# Altium PCB source.PcbDoc
Units mm, origin at the board's own origin, x right, y up, seen from the top; angles counter-clockwise.
Board outline 48.89 x 37.97 mm, 4 copper layers (Top Layer, Layer 1, Layer 2, Bottom Layer), stack 0.603 mm thick; 55 components, 44 nets, 142 pads, 12 vias.
Unrouted connection lines stored in the file: 27.
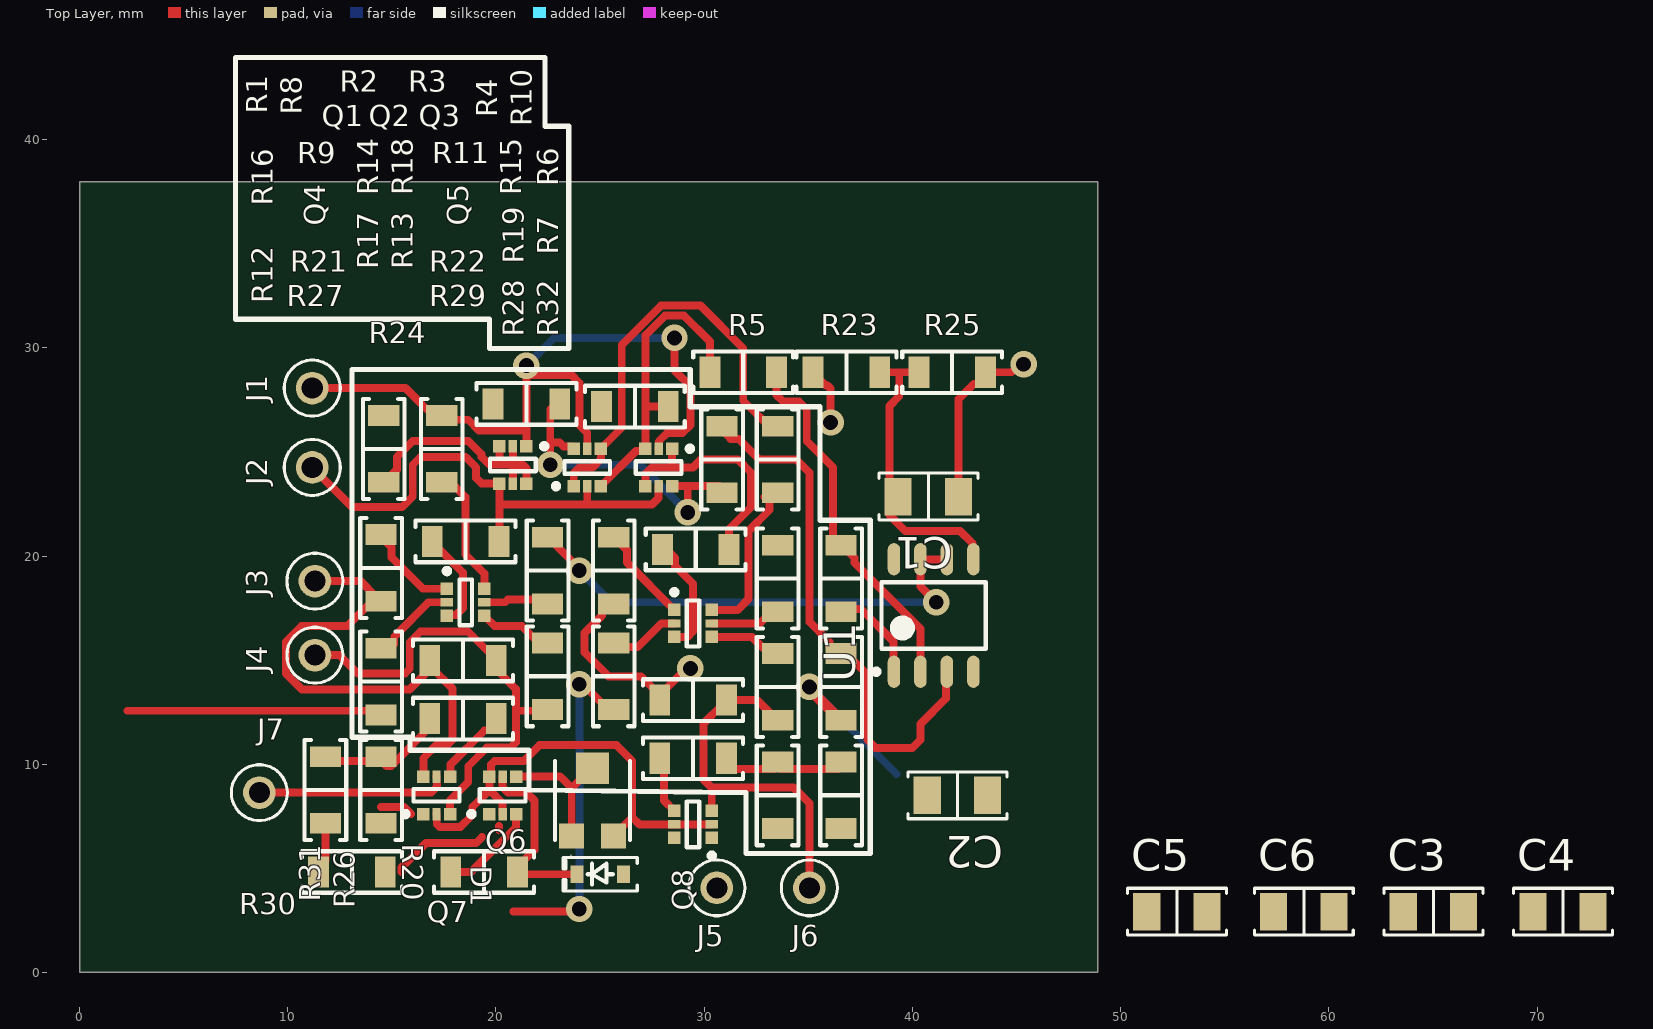
[diagram p0: Top Layer view]
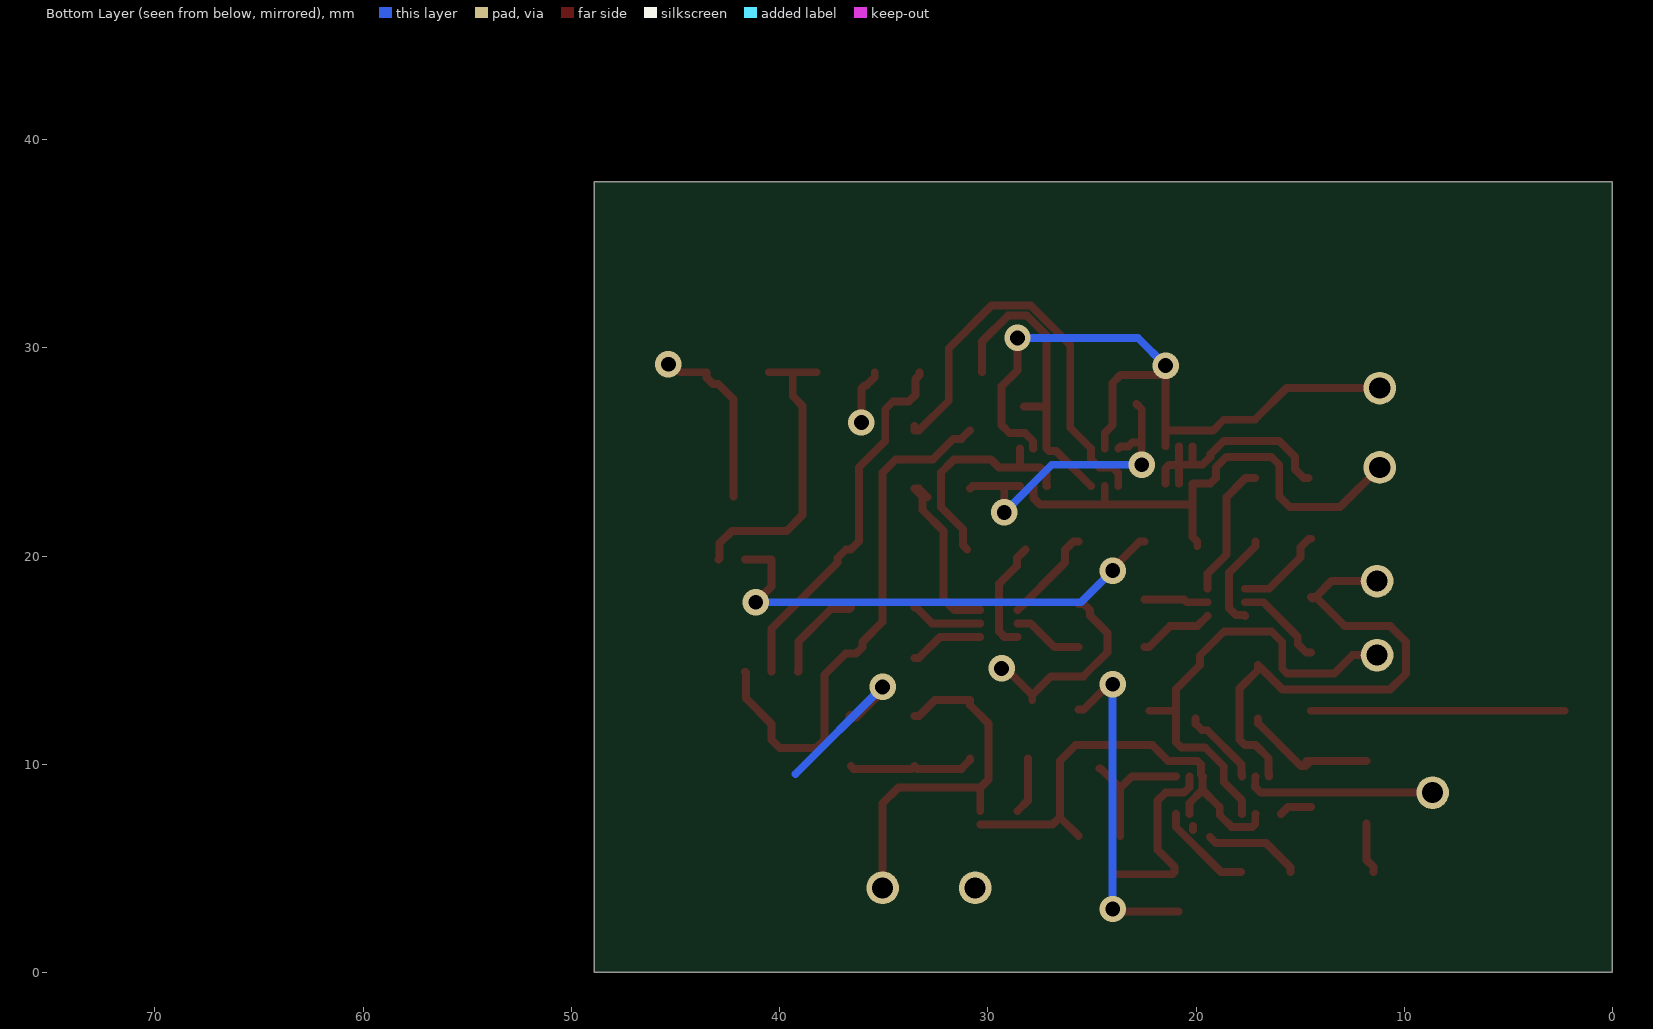
[diagram p1: Bottom Layer view, seen from below]
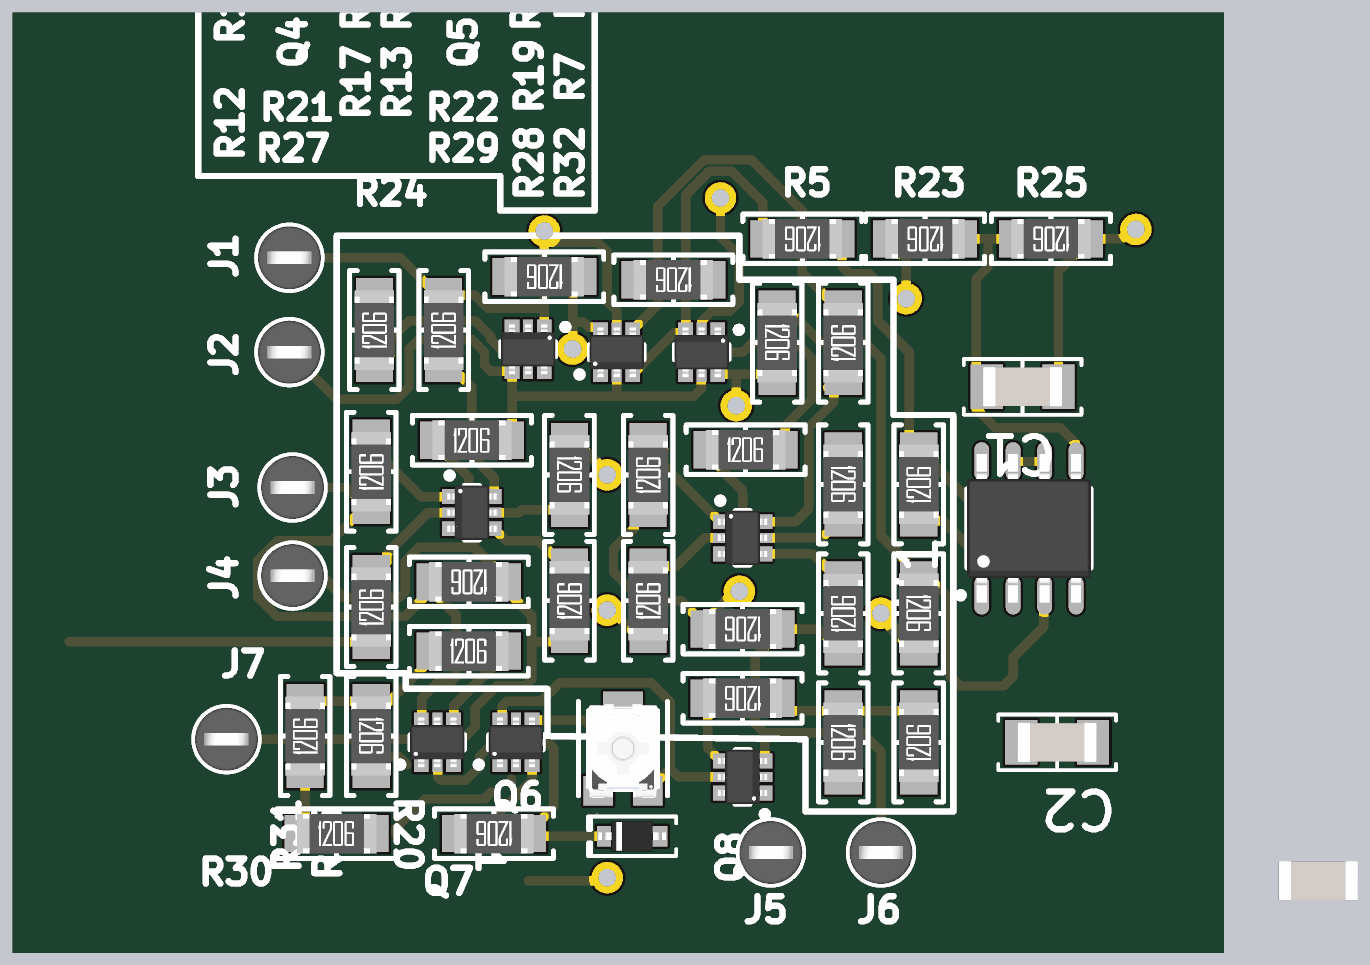
[diagram p2: 3D render of the assembled board from above, using the file's embedded part models]

## Layer stack, top to bottom
Top Solder: solder mask 0.0102, Solder Resist, Dk 3.5
Top Layer: signal copper 0.0356
Dielectric 2: prepreg 0.0711, PP-006, Dk 4.1
Layer 1: signal copper 0.035
Dielectric 1: dielectric 0.32, FR-4, Dk 4.8
Layer 2: signal copper 0.035
Dielectric 3: prepreg 0.0711, PP-006, Dk 4.1
Bottom Layer: signal copper 0.0356
Bottom Solder: solder mask 0.0102, Solder Resist, Dk 3.5

## Board outline
0,0 0,37.973 48.895,37.973 48.895,0

## Design rules (kind name [scope] priority, off if disabled: settings)
BoardOutlineClearance [All] p1: gap=0.3 ignorepadtopadclearanceinfootprint=FALSE except(0.4: Arc-SplitBarrior Arc-SplitContinuation Track-SplitBarrior Track-SplitContinuation SMDPad-SplitBarrior SMDPad-SplitContinuation THPad-SplitBarrior THPad-SplitContinuation Via-SplitBarrior Via-SplitContinuation Fill-SplitBarrior Fill-SplitContinuation Poly-SplitBarrior Poly-SplitContinuation Region-SplitBarrior Region-SplitContinuation Text-SplitBarrior Text-SplitContinuation)
Clearance "Clearance Different Nets" [All] p1: gap=0.2 ignorepadtopadclearanceinfootprint=FALSE except(0.089: Arc-Arc Arc-Track Arc-SMDPad Track-Track Track-SMDPad; 0.127: SMDPad-SMDPad SMDPad-Via THPad-Via Via-Via; 0.254: Arc-Via Arc-Text Track-Via Track-Text SMDPad-Text THPad-Text Via-Text Fill-Text Poly-Text Region-Text Text-Text; 0.5: THPad-THPad Via-Hole)
Clearance "Clearance Same Nets" [All] p2: gap=0.2 ignorepadtopadclearanceinfootprint=FALSE except(0.089: Arc-Arc Arc-Track Arc-SMDPad Track-Track Track-SMDPad SMDPad-SMDPad; 0.127: SMDPad-Via THPad-Via; 0.254: Arc-Via Arc-Text Track-Via Track-Text SMDPad-Text THPad-Text Via-Via Via-Text Fill-Text Poly-Text Region-Text Text-Text)
Clearance "Clearance Bottom Layer" [OnLayer('Bottom Layer')] p3: gap=0.203 ignorepadtopadclearanceinfootprint=TRUE except(0.254: Arc-Text Track-Text SMDPad-Text THPad-Text Via-Text Fill-Text Poly-Text Region-Text Text-Text)
Clearance "Clearance Top Layer" [OnLayer('Top Layer')] p4: gap=0.203 ignorepadtopadclearanceinfootprint=TRUE except(0.254: Arc-Text Track-Text SMDPad-Text THPad-Text Via-Text Fill-Text Poly-Text Region-Text Text-Text)
Clearance [All] p5: gap=0.254 ignorepadtopadclearanceinfootprint=FALSE except(0: Arc-Hole Track-Hole SMDPad-Hole THPad-Hole Via-Hole Fill-Hole Poly-Hole Region-Hole Text-Hole)
HoleSize [All] p1: absolutevalues=TRUE maxlimit=6.3 minlimit=0.2 maxpercent=80.000 minpercent=20.000
MinimumAnnularRing [All] p1: minimumring=0.13
MinimumSolderMaskSliver [All] p1: minsoldermaskwidth=0.1
ParallelSegment [All] p1: limit=254 gap=0.254
PolygonConnect PolygonConnect_1 [All] p1: thpad.connectstyle=Relief thpad.reliefconductorwidth=0.508 thpad.reliefentries=4 thpad.polygonreliefangle="90 Angle" thpad.airgapwidth=0.254 smdpad.connectstyle=Relief smdpad.reliefconductorwidth=0.508 smdpad.reliefentries=4 smdpad.polygonreliefangle="90 Angle" smdpad.airgapwidth=0.254 via.connectstyle=Direct via.reliefconductorwidth=0.508 via.reliefentries=4 via.polygonreliefangle="90 Angle" via.airgapwidth=0.254
PolygonConnect [All] p2: connectstyle=Relief reliefconductorwidth=0.254 reliefentries=4 polygonreliefangle="90 Angle" airgapwidth=0.254
RoutingCorners [All] p1: cornerstyle=Round minsetback=2.54 maxsetback=2.54
RoutingVias [All] p1: holewidth=0.5 width=1 viastyle="Through Hole" minholewidth=0.2 minwidth=0.35 maxholewidth=1 maxwidth=2
SilkToSilkClearance [All] p1: silktosilkclearance=0.1
SilkToSolderMaskClearance [IsPad] p1: minsilkscreentomaskgap=0.1 clearancetoexposedcopper=TRUE
SolderMaskExpansion [All] p1: expansion=0.102 istentingtop=FALSE
Width [All] p1: maxlimit=2.54 minlimit=0.089 preferedwidth=0.381
25 further rules are at their usual default settings.

## Classes and differential pairs
component class misc: C3 C4 C5 C6 C?
component class vca_A: C1 C2 D1 J1 J2 J3 J4 J5 J6 J7 Q1 Q2 Q3 Q4 Q5 Q6 Q7 Q8 R1 R2 R3 R4 R5 R6 R7 R8 R9 R10 R11 R12 R13 R14 R15 R16 R17 R18 R19 R20 R21 R22 R23 R24 R25 R26 R27 R28 R29 R30 R31 R32 U1

## Components (designator, comment, footprint, x,y, rotation, side; value= is the part's Value field where it differs from the comment)
C1 "0.1 µF" "CAP 1206_3216 - 0.8MM" 40.767,22.86 r180 top
C2 "1 µF" "CAP 1206_3216 - 0.8MM" 42.164,8.509 r180 top
C3 "0.1 µF" "CAP 1206_3216 - 0.8MM" 65.024,2.921 r0 top
C4 "1 µF" "CAP 1206_3216 - 0.8MM" 71.247,2.921 r0 top
C5 "0.1 µF" "CAP 1206_3216 - 0.8MM" 52.705,2.921 r0 top
C6 "1 µF" "CAP 1206_3216 - 0.8MM" 58.801,2.921 r0 top
D1 "4V7" SOD323 25.019,4.699 r180 top
J1 "5001" FP-5001-MFG 11.176,28.067 r0 top
J2 "5001" FP-5001-MFG 11.176,24.257 r0 top
J3 "5001" FP-5001-MFG 11.303,18.796 r0 top
J4 "5001" FP-5001-MFG 11.303,15.24 r0 top
J5 "5001" FP-5001-MFG 30.607,4.064 r0 top
J6 "5001" FP-5001-MFG 35.052,4.064 r0 top
J7 "5001" FP-5001-MFG 8.636,8.636 r0 top
Q1 "BC846BS" TSOP65P210X110-6N 20.813,24.373 r270 top
Q2 "BC846BS" TSOP65P210X110-6N 24.384,24.257 r90 top
Q3 "BC846BS" TSOP65P210X110-6N 27.813,24.257 r270 top
Q4 "BC846BS" TSOP65P210X110-6N 18.542,17.78 r0 top
Q5 "BC846BS" TSOP65P210X110-6N 29.464,16.764 r0 top
Q6 "BC846BS" TSOP65P210X110-6N 20.32,8.509 r90 top
Q7 "BC846BS" TSOP65P210X110-6N 17.145,8.509 r90 top
Q8 "BC846BS" TSOP65P210X110-6N 29.464,7.112 r180 top
R1 "330 Ohms" "YAGEO RES 1206_3216" 14.605,25.146 r90 top
R2 "330 Ohms" "YAGEO RES 1206_3216" 21.463,27.305 r180 top
R3 "330 Ohms" "YAGEO RES 1206_3216" 26.67,27.178 r180 top
R4 "5 kOhms" "YAGEO RES 1206_3216" 30.861,24.638 r270 top
R5 "5 kOhms" "YAGEO RES 1206_3216" 31.877,28.829 r180 top
R6 "68 kOhms" "YAGEO RES 1206_3216" 36.576,18.923 r90 top
R7 "68 kOhms" "YAGEO RES 1206_3216" 36.576,13.716 r270 top
R8 "100 Ohms" "YAGEO RES 1206_3216" 17.399,25.146 r90 top
R9 "100 Ohms" "YAGEO RES 1206_3216" 18.542,20.701 r0 top
R10 "100 Ohms" "YAGEO RES 1206_3216" 33.528,24.638 r90 top
R11 "100 Ohms" "YAGEO RES 1206_3216" 29.591,20.32 r0 top
R12 "10 kOhms" "YAGEO RES 1206_3216" 14.478,13.97 r90 top
R13 "10 kOhms" "YAGEO RES 1206_3216" 25.654,14.224 r90 top
R14 "10 kOhms" "YAGEO RES 1206_3216" 22.479,19.304 r270 top
R15 "10 kOhms" "YAGEO RES 1206_3216" 33.528,18.923 r270 top
R16 "100 Ohms" "YAGEO RES 1206_3216" 14.478,19.431 r90 top
R17 "100 Ohms" "YAGEO RES 1206_3216" 22.479,14.224 r90 top
R18 "100 Ohms" "YAGEO RES 1206_3216" 25.654,19.304 r90 top
R19 "100 Ohms" "YAGEO RES 1206_3216" 33.528,13.713 r90 top
R20 "1 kOhms" "YAGEO RES 1206_3216" 19.431,4.826 r180 top
R21 "3.3 kOhms" "YAGEO RES 1206_3216" 18.415,14.986 r180 top
R22 "3.3 kOhms" "YAGEO RES 1206_3216" 29.464,13.081 r180 top
R23 "68 kOhms" "YAGEO RES 1206_3216" 36.83,28.829 r180 top
R24 "TC33X-2-502G" TC33X2503E 24.638,8.255 r0 top
R25 "68 kOhms" "YAGEO RES 1206_3216" 41.91,28.829 r180 top
R26 "1 Ohms" "YAGEO RES 1206_3216" 14.478,8.763 r270 top
R27 "1 Ohms" "YAGEO RES 1206_3216" 18.415,12.192 r0 top
R28 "1 Ohms" "YAGEO RES 1206_3216" 33.528,8.509 r270 top
R29 "1 Ohms" "YAGEO RES 1206_3216" 29.464,10.287 r180 top
R30 "330 Ohms" "YAGEO RES 1206_3216" 13.081,4.826 r0 top
R31 "330 Ohms" "YAGEO RES 1206_3216" 11.811,8.763 r90 top
R32 "330 Ohms" "YAGEO RES 1206_3216" 36.576,8.509 r90 top
U1 "TLV9362" SOIC8-127P600X175-8N 41.021,17.145 r90 top

## Footprints (in the part's own frame and the unit in brackets; to place one, negate y for a bottom-side part, rotate by r counter-clockwise, add the part's x,y. Pads: shape width x height; smd on the part's side, far side on the other; paste and mask are expansions set on the pad)
"CAP 1206_3216 - 0.8MM" [mm] "Chip Capacitor, 2-Leads, Body 3.25x1.60mm, IPC Medium Density"
  rect 1.3x1.8 smd: 1(-1.45,0) 2(1.45,0)
  silkscreen extent -2.37,-1.12 2.37,1.12, body extent -1.6,-0.8 1.6,0.8, height 0.8
FP-5001-MFG [mm]
  round 1.57 hole 1.016 paste-2539.97 mask+0: 1(0,0)
  silkscreen extent -1.35,-1.34 1.35,1.34, body extent -1.45,-1.45 1.45,1.45, height 0.25
SOD323 [mm]
  rect 0.625x0.83 smd: 1(-1.101,-0.02) 2(1.124,-0.02)
  silkscreen extent -1.77,-0.82 1.79,0.78, body extent -1.35,-0.64 1.37,0.6, height 1.05
SOIC8-127P600X175-8N [mm] "SOIC, 8-Leads, Body 4.91x3.90mm, Pitch 1.27mm, IPC Medium Density"
  oval 1.55x0.6 smd: 1(-2.7,1.905) 2(-2.7,0.635) 3(-2.7,-0.635) 4(-2.7,-1.905) 5(2.7,-1.905) 6(2.7,-0.635) 7(2.7,0.635) 8(2.7,1.905)
  silkscreen extent -2.82,-2.5 1.6,2.88, body extent -3,-2.5 3,2.5, height 1.75
TC33X2503E [mm]
  rect 1.2x1.2 smd: 1(-1,-1.7) 3(1,-1.7)
  rect 1.6x1.5 smd: 2(0,1.55)
  silkscreen extent -1.8,-2.64 1.8,1.9, body extent -1.5,-2 1.5,1.8, height 1.22
TSOP65P210X110-6N [mm] "TSOP, 6-Leads, Body 2.00x1.25mm, Pitch 0.65mm, IPC Medium Density"
  rect 0.6x0.6 smd: 1(-0.9,0.65) 3(-0.9,-0.65) 4(0.9,-0.65) 6(0.9,0.65)
  rect 0.6x0.4 smd: 2(-0.9,0) 5(0.9,0)
  silkscreen extent -1.02,-1.1 0.3,1.63, body extent -1.04,-1.1 1.04,1.1, height 1.1
"YAGEO RES 1206_3216" [mm] "Chip Resistor, 2-Leads, Body 3.13x1.55mm"
  rect 1x1.5 smd: 1(-1.6,0) 2(1.6,0)
  silkscreen extent -2.4,-1 2.4,1, body extent -1.6,-0.8 1.6,0.8, height 0.6

## Part data
C1 C3 C5: library part 885012208087, "CAP CER 0.1UF 50V X7R 1206", Device Package="1206 (3216 Metric)", manufacturer="Würth Elektronik", Operating Temperature="-55°C ~ 125°C", Supplier Part Number 1=732-8127-1-ND, Temperature Coefficient=X7R, Tolerance=±10%, Voltage - Rated=50V, Applications="General Purpose", Capacitance="0.1 µF", componentlink1description=Datasheet, componentlink1url=https://katalog.we-online.de/pbs/datasheet/885012208087.pdf, componentlink2description="DigiKey Link", componentlink2url=https://www.digikey.com/en/products/detail/würth-elektronik/885012208087/5453982, lastupdated="6/4/2024 19:10:27", Lifecycle Status=Active, Minimum Order=1, Mounting Type="Surface Mount, MLCC", Package / Case="1206 (3216 Metric)", Packaging=TapeAndReel, Part Number=885012208087, Part Status=Active, partid=20879, price=0.06, Series=WCAP-CSGP, Size / Dimension="0.126\" L x 0.063\" W (3.20mm x 1.60mm)", Supplier 1=DigiKey, Thickness (Max)="0.035\" (0.90mm)"
C2 C4 C6: library part 885012208093, "CAP CER 1UF 50V X7R 1206", Device Package="1206 (3216 Metric)", manufacturer="Würth Elektronik", Operating Temperature="-55°C ~ 125°C", Supplier Part Number 1=732-7577-1-ND, Temperature Coefficient=X7R, Tolerance=±10%, Voltage - Rated=50V, Applications="General Purpose", Capacitance="1 µF", componentlink1description=Datasheet, componentlink1url=https://katalog.we-online.de/pbs/datasheet/885012208093.pdf, componentlink2description="DigiKey Link", componentlink2url=https://www.digikey.com/en/products/detail/würth-elektronik/885012208093/5453432, lastupdated="6/4/2024 19:10:33", Lifecycle Status=Active, Minimum Order=1, Mounting Type="Surface Mount, MLCC", Package / Case="1206 (3216 Metric)", Packaging=TapeAndReel, Part Number=885012208093, Part Status=Active, partid=39665, price=0.10, Series=WCAP-CSGP, Size / Dimension="0.126\" L x 0.063\" W (3.20mm x 1.60mm)", Supplier 1=DigiKey, Thickness (Max)="0.075\" (1.90mm)"
D1: library part BZX38450-C4V7X
J1 J2 J3 J4 J5 J6 J7: library part CMP-2000-05181-2, "PC TEST POINT MINIATURE BLACK", Color=Black, Flammability Rating="UL94 V-0", Package Quantity=100, Body Material=Bronze, Contact Material=Bronze, Contact Plating=Silver, Diameter=2.54mm, Height=0.3inch, Hole Diameter=1.6mm, Housing Color=Black, Inside Diameter=1.27mm, Insulation=Insulated, Insulation Material=Nylon, Lead Free="Lead Free", Length=7.62mm, Material=Nylon, Mount="Through Hole", Number of Contacts=1, Number of Ports=1, Orientation=Straight, Outside Diameter=2.54mm, Packaging=Bulk, Plating=Silver, REACH SVHC="No SVHC", RoHS Compliant=Yes, Series=THM, Termination="Through Hole"
Q1 Q2 Q3 Q4 Q5 Q6 Q7 Q8: "65 V, 100 mA matched NPN/NPN general-purpose transistor", componentlink1description=Datasheet, componentlink1url=https://assets.nexperia.com/documents/data-sheet/BC846BS.pdf
R1 R2 R3 R30 R31 R32: library part RT1206FRD07330RL, "RES SMD 330 OHM 1% 1/4W 1206", Device Package="1206 (3216 Metric)", manufacturer=Yageo, Operating Temperature="-55°C ~ 155°C", Power (Watts)="0.25W, 1/4W", Supplier Device Package=1206, Supplier Part Number 1=13-RT1206FRD07330RLCT-ND, Temperature Coefficient=±25ppm/°C, Tolerance=±1%, componentlink1description=Datasheet, componentlink1url=https://www.yageo.com/upload/media/product/productsearch/datasheet/rchip/PYu-RT_1-to-0.01_RoHS_L_15.pdf, componentlink2description="DigiKey Link", componentlink2url=https://www.digikey.com/en/products/detail/yageo/RT1206FRD07330RL/5938576, Composition="Thin Film", Height - Seated (Max)="0.026\" (0.65mm)", lastupdated="7/25/2024 09:21:16", Lifecycle Status=Active, Minimum Order=1, Number of Terminations=2, Package / Case="1206 (3216 Metric)", Packaging=TapeAndReel, Part Number=RT1206FRD07330RL, partid=79140, price=0.01, Resistance="330 Ohms", Series=RT, Size / Dimension="0.122\" L x 0.063\" W (3.10mm x 1.60mm)", Supplier 1=DigiKey
R4 R5: library part RT1206FRE075KL, "RES 5K OHM 1% 1/4W 1206", Device Package="1206 (3216 Metric)", manufacturer=Yageo, Operating Temperature="-55°C ~ 155°C", Power (Watts)="0.25W, 1/4W", Supplier Device Package=1206, Supplier Part Number 1=13-RT1206FRE075KLCT-ND, Temperature Coefficient=±50ppm/°C, Tolerance=±1%, componentlink1description=Datasheet, componentlink1url=https://www.yageo.com/upload/media/product/app/datasheet/rchip/pyu-rt_1-to-0.01_rohs_l.pdf, componentlink2description="DigiKey Link", componentlink2url=https://www.digikey.com/en/products/detail/yageo/RT1206FRE075KL/7708705, Composition="Thin Film", Height - Seated (Max)="0.026\" (0.65mm)", lastupdated="7/25/2024 09:21:03", Lifecycle Status=Active, Minimum Order=1, Number of Terminations=2, Package / Case="1206 (3216 Metric)", Packaging=TapeAndReel, Part Number=RT1206FRE075KL, partid=88354, price=0.01, Resistance="5 kOhms", Series=RT, Size / Dimension="0.122\" L x 0.063\" W (3.10mm x 1.60mm)", Supplier 1=DigiKey
R6 R7 R23 R25: library part RT1206FRE0768KL, "RES SMD 68K OHM 1% 1/4W 1206", Device Package="1206 (3216 Metric)", manufacturer=Yageo, Operating Temperature="-55°C ~ 155°C", Power (Watts)="0.25W, 1/4W", Supplier Device Package=1206, Supplier Part Number 1=13-RT1206FRE0768KLCT-ND, Temperature Coefficient=±50ppm/°C, Tolerance=±1%, componentlink1description=Datasheet, componentlink1url=https://www.yageo.com/upload/media/product/productsearch/datasheet/rchip/PYu-RT_1-to-0.01_RoHS_L_12.pdf, componentlink2description="DigiKey Link", componentlink2url=https://www.digikey.com/en/products/detail/yageo/RT1206FRE0768KL/1083332, Composition="Thin Film", Height - Seated (Max)="0.026\" (0.65mm)", lastupdated="7/25/2024 09:21:23", Lifecycle Status=Active, Minimum Order=1, Number of Terminations=2, Package / Case="1206 (3216 Metric)", Packaging=TapeAndReel, Part Number=RT1206FRE0768KL, Part Status=Active, partid=58462, price=0.01, Resistance="68 kOhms", Series=RT, Size / Dimension="0.122\" L x 0.063\" W (3.10mm x 1.60mm)", Supplier 1=DigiKey
R8 R9 R10 R11 R16 R17 R18 R19: library part RT1206FRD07100RL, "RES SMD 100 OHM 1% 1/4W 1206", Device Package="1206 (3216 Metric)", manufacturer=Yageo, Operating Temperature="-55°C ~ 155°C", Power (Watts)="0.25W, 1/4W", Supplier Device Package=1206, Supplier Part Number 1=13-RT1206FRD07100RLCT-ND, Temperature Coefficient=±25ppm/°C, Tolerance=±1%, componentlink1description=Datasheet, componentlink1url=https://www.yageo.com/upload/media/product/productsearch/datasheet/rchip/PYu-RT_1-to-0.01_RoHS_L_12.pdf, componentlink2description="DigiKey Link", componentlink2url=https://www.digikey.com/en/products/detail/yageo/RT1206FRD07100RL/5938292, Composition="Thin Film", Height - Seated (Max)="0.026\" (0.65mm)", lastupdated="7/25/2024 09:21:23", Lifecycle Status=Active, Minimum Order=1, Number of Terminations=2, Package / Case="1206 (3216 Metric)", Packaging=TapeAndReel, Part Number=RT1206FRD07100RL, Part Status=Active, partid=58461, price=0.01, Resistance="100 Ohms", Series=RT, Size / Dimension="0.122\" L x 0.063\" W (3.10mm x 1.60mm)", Supplier 1=DigiKey
R12 R13 R14 R15: library part RT1206FRE0710KL, "RES SMD 10K OHM 1% 1/4W 1206", Device Package="1206 (3216 Metric)", manufacturer=Yageo, Operating Temperature="-55°C ~ 155°C", Power (Watts)="0.25W, 1/4W", Supplier Device Package=1206, Supplier Part Number 1=YAG1242CT-ND, Temperature Coefficient=±50ppm/°C, Tolerance=±1%, componentlink1description=Datasheet, componentlink1url=https://www.yageo.com/upload/media/product/productsearch/datasheet/rchip/PYu-RT_1-to-0.01_RoHS_L_11.pdf, componentlink2description="DigiKey Link", componentlink2url=https://www.digikey.com/en/products/detail/yageo/RT1206FRE0710KL/1082868, Composition="Thin Film", Height - Seated (Max)="0.026\" (0.65mm)", lastupdated="7/25/2024 09:21:28", Lifecycle Status=Active, Minimum Order=1, Number of Terminations=2, Package / Case="1206 (3216 Metric)", Packaging=TapeAndReel, Part Number=RT1206FRE0710KL, Part Status=Active, partid=38903, price=0.01, Resistance="10 kOhms", Series=RT, Size / Dimension="0.122\" L x 0.063\" W (3.10mm x 1.60mm)", Supplier 1=DigiKey
R20: library part RT1206FRE071KL, "RES SMD 1K OHM 1% 1/4W 1206", Device Package="1206 (3216 Metric)", manufacturer=Yageo, Operating Temperature="-55°C ~ 155°C", Power (Watts)="0.25W, 1/4W", Supplier Device Package=1206, Supplier Part Number 1=YAG3366CT-ND, Temperature Coefficient=±50ppm/°C, Tolerance=±1%, componentlink1description=Datasheet, componentlink1url=https://www.yageo.com/upload/media/product/productsearch/datasheet/rchip/PYu-RT_1-to-0.01_RoHS_L_11.pdf, componentlink2description="DigiKey Link", componentlink2url=https://www.digikey.com/en/products/detail/yageo/RT1206FRE071KL/1083016, Composition="Thin Film", Height - Seated (Max)="0.026\" (0.65mm)", lastupdated="7/25/2024 09:21:27", Lifecycle Status=Active, Minimum Order=1, Number of Terminations=2, Package / Case="1206 (3216 Metric)", Packaging=TapeAndReel, Part Number=RT1206FRE071KL, Part Status=Active, partid=40465, price=0.01, Resistance="1 kOhms", Series=RT, Size / Dimension="0.122\" L x 0.063\" W (3.10mm x 1.60mm)", Supplier 1=DigiKey
R21 R22: library part RT1206FRE073K3L, "RES SMD 3.3K OHM 1% 1/4W 1206", Device Package="1206 (3216 Metric)", manufacturer=Yageo, Operating Temperature="-55°C ~ 155°C", Power (Watts)="0.25W, 1/4W", Supplier Device Package=1206, Supplier Part Number 1=13-RT1206FRE073K3LCT-ND, Temperature Coefficient=±50ppm/°C, Tolerance=±1%, componentlink1description=Datasheet, componentlink1url=https://www.yageo.com/upload/media/product/productsearch/datasheet/rchip/PYu-RT_1-to-0.01_RoHS_L_12.pdf, componentlink2description="DigiKey Link", componentlink2url=https://www.digikey.com/en/products/detail/yageo/RT1206FRE073K3L/1083187, Composition="Thin Film", Height - Seated (Max)="0.026\" (0.65mm)", lastupdated="7/25/2024 09:21:22", Lifecycle Status=Active, Minimum Order=1, Number of Terminations=2, Package / Case="1206 (3216 Metric)", Packaging=TapeAndReel, Part Number=RT1206FRE073K3L, Part Status=Active, partid=58380, price=0.01, Resistance="3.3 kOhms", Series=RT, Size / Dimension="0.122\" L x 0.063\" W (3.10mm x 1.60mm)", Supplier 1=DigiKey
R24: "Resistor", Manufacturer_Name=Bourns, Mouser Part Number=652-TC33X-2-502G, Arrow Part Number=TC33X-2-502G, Arrow Price/Stock=https://www.arrow.com/en/products/tc33x-2-502g/bourns?region=nac, Datasheet Link=https://componentsearchengine.com/Datasheets/1/TC33X-2-502G.pdf, Height=1.2mm, Manufacturer_Part_Number=TC33X-2-502G, Mouser Price/Stock=https://www.mouser.co.uk/ProductDetail/Bourns/TC33X-2-502G?qs=UmpSLsh52mVfPYqLYJpjzQ%3D%3D
R26 R27 R28 R29: library part RT1206BRD071RL, "RES 1 OHM 0.1% 1/4W 1206", Device Package="1206 (3216 Metric)", manufacturer=Yageo, Operating Temperature="-55°C ~ 155°C", Power (Watts)="0.25W, 1/4W", Supplier Device Package=1206, Supplier Part Number 1=13-RT1206BRD071RLCT-ND, Temperature Coefficient=±25ppm/°C, Tolerance=±0.1%, componentlink1description=Datasheet, componentlink1url=https://www.yageo.com/upload/media/product/productsearch/datasheet/rchip/PYu-RT_1-to-0.01_RoHS_L_15.pdf, componentlink2description="DigiKey Link", componentlink2url=https://www.digikey.com/en/products/detail/yageo/RT1206BRD071RL/17018181, Composition="Thin Film", Features="Moisture Resistant", Height - Seated (Max)="0.026\" (0.65mm)", lastupdated="7/25/2024 09:21:16", Lifecycle Status=Active, Minimum Order=1, Number of Terminations=2, Package / Case="1206 (3216 Metric)", Packaging=TapeAndReel, Part Number=RT1206BRD071RL, partid=79150, price=0.14, Resistance="1 Ohms", Series=RT, Size / Dimension="0.122\" L x 0.063\" W (3.10mm x 1.60mm)", Supplier 1=DigiKey
U1: "TLV936x 10-MHz, 40-V, RRO, Operational Amplifie", componentlink1description=Datasheet, componentlink1url=https://www.ti.com/lit/ds/symlink/tlv9362.pdf

## Via types
v1: diameter 1.27, hole 0.711, Top Layer to Bottom Layer, 12 vias

## Nets (pads, with @x,y where several pads share a name; then routed paths per layer and width w, separated by ;. In a path a pad name is that pad's centre, name@x,y a point inside that pad or via, vN(x,y) a via of type N, cw(c..) or ccw(c..) an arc to the next point about the centre after c; other vN are vias at no path point)
GND: C1.1 C3.2 C4.2 C5.2 C6.2 R7.2 R25.1 | length 16.7
  Top Layer w0.381: C1.1 42.217,27.536 42.95,28.269 43.2,28.269 43.51,28.579 R25.1 44.757,28.829 45.138,29.21 v1(45.339,29.21)
  Top Layer w0.508: v1(35.052,13.716) 35.052,13.615 36.351,12.316 R7.2@36.576,12.316
  Bottom Layer w0.381: v1(35.052,13.716) 39.245,9.523
NetC1_2: C1.2 R23.1 R25.2 U1.5 | length 14.7
  Top Layer w0.381: R23.1@38.23,28.829 39.37,28.829 ; R25.2@40.51,28.829 39.37,28.829 ; U1.5 42.884,19.887 42.884,20.616 42.291,21.209 39.658,21.209 38.896,21.971 38.896,27.212 39.37,27.686 39.37,28.829
NetC2_2: C2.2 D1.2 Q6.5 R20.1 | length 9
  Top Layer w0.381: Q6.5 20.32,8.89 20.574,8.636 21.463,8.636 21.844,8.255 21.844,5.889 21.031,5.076 R20.1 21.138,4.719 D1.2
NetJ1_1: J1.1 Q1.1 Q2.5 Q3.2 R8.2 | length 35.4
  Top Layer w0.381: J1.1 15.653,28.067 17.174,26.546 18.666,26.546 19.177,26.035 21.463,26.035 ; Q1.1 21.463,26.035 ; v1(21.463,29.146) v1@21.463,28.702 ; Q2.5 24.384,25.908 24.003,26.289 24.003,28.321 23.622,28.702 v1@21.463,28.702 ; Q3.2 27.822,25.167 27.822,25.512 28.211,25.9 28.948,25.9 29.337,26.289 29.337,28.155 28.575,28.917 v1(28.575,30.48) ; 21.463,26.035 v1@21.463,28.702
  Bottom Layer w0.381: v1(21.463,29.146) 22.796,30.48 v1(28.575,30.48)
NetJ2_1: J2.1 Q1.4 Q2.2 Q3.5 R9.2 | length 24.8
  Top Layer w0.381: J2.1 13.081,22.352 15.494,22.352 16.002,22.86 16.002,24.384 16.383,24.765 18.542,24.765 19.05,24.257 19.05,23.749 19.304,23.495 20.141,23.495 Q1.4 20.163,22.479 ; R9.2@19.942,20.476 19.942,20.701 20.163,20.922 20.163,22.479 ; Q2.2 24.384,22.479 ; Q3.5 27.804,23.348 27.804,22.793 27.489,22.479 24.384,22.479 ; 20.163,22.479 24.384,22.479
NetJ3_1: J3.1 Q6.6 R16.1 R21.2 | length 25.4
  Top Layer w0.381: J3.1@10.795,18.796 J3.1 13.488,18.796 R16.1@14.253,18.031 ; R16.1@14.403,17.956 14.478,18.031 R16.1@14.253,18.031 ; 16.495,9.409 16.495,9.503 16.51,9.518 16.51,10.287 17.145,10.922 17.653,10.922 17.907,11.176 17.907,13.644 17.015,14.536 17.015,14.761 16.903,14.649 15.843,13.589 10.679,13.589 9.906,14.362 9.906,15.875 10.668,16.637 12.859,16.637 R16.1@14.253,18.031
NetJ4_1: J4.1 Q7.3 R17.1 R21.1 | length 22.3
  Top Layer w0.381: J4.1 12.478,15.24 13.367,14.351 15.621,14.351 15.859,14.589 15.859,15.859 16.383,16.383 18.643,16.383 19.815,15.211 19.815,14.761 20.955,13.621 20.955,12.526 ; Q7.3 17.795,8.27 18.669,9.144 18.669,9.906 19.558,10.795 20.701,10.795 20.955,11.049 20.955,12.526 ; R17.1@22.225,12.57 20.999,12.57 20.955,12.526
NetJ5_1: J5.1 Q7.6 R18.1 R22.2 | length 9.8
  Top Layer w0.381: R18.1 25.404,17.704 25.094,17.394 25.094,17.144 24.257,16.307 24.257,15.378 25.411,14.224 26.971,14.224 R22.2@27.864,13.331 ; R22.2 R22.2@27.864,13.331 ; v1(29.337,14.605) 29.138,14.605 R22.2@27.864,13.331
NetJ6_1: J6.1 Q8.3 R19.1 R22.1 | length 17.9
  Top Layer w0.381: Q8.3 30.364,8.879 30.353,8.89 ; R19.1@33.528,12.313 33.303,12.313 32.535,13.081 30.864,13.081 30.864,12.856 29.972,11.964 29.972,9.271 30.353,8.89 ; J6.1 35.052,8.128 34.29,8.89 30.353,8.89
NetJ7_1: J7.1 Q6.2 Q7.2 Q7.5 Q8.2 Q8.5 Q8.6 R24.3 | length 31.3
  Top Layer w0.381: J7.1 16.891,8.636 17.16,8.905 17.16,8.994 17.154,8.999 17.154,9.399 Q7.5 ; Q7.2 17.154,7.599 17.154,7.128 17.298,6.985 18.288,6.985 18.86,7.556 18.86,7.938 19.685,8.763 ; 19.67,9.409 19.685,9.424 ; Q6.2 20.32,8.128 19.685,8.763 ; R24.3 26.543,7.46 ; Q8.2 Q8.5 26.891,7.112 26.543,7.46 ; 19.685,8.763 19.685,9.424 ; 19.685,9.424 19.767,9.506 19.767,9.988 19.939,10.16 21.336,10.16 22.098,10.922 25.781,10.922 26.543,10.16 26.543,7.46
NetQ1_2: Q1.2 Q1.3 Q1.5 Q1.6 R1.1 | length 12.1
  Top Layer w0.381: R1.1@14.605,23.746 14.83,23.746 15.239,24.156 15.239,24.293 15.24,24.765 16.002,25.527 18.669,25.527 19.304,24.892 19.304,24.765 19.685,24.384 20.32,24.384 ; Q1.3 20.163,24.541 20.32,24.384 ; Q1.5 20.813,24.373 ; Q1.2 20.813,24.373 ; Q1.6 21.463,24.204 21.294,24.373 20.813,24.373 ; 20.32,24.384 20.802,24.384 20.813,24.373
NetQ2_1: Q2.1 Q2.4 R10.2 | length 20.5
  Top Layer w0.381: Q2.1 23.734,23.988 24.003,24.257 24.638,24.257 25.034,24.653 Q2.4 26.039,26.162 26.039,30.135 27.933,32.029 29.82,32.029 31.877,29.972 31.877,27.464 33.303,26.038 33.528,26.038 R10.2
NetQ2_3: Q2.3 Q3.3 R3.1 R5.2 | length 15
  Top Layer w0.381: Q2.3 26.725,25.048 27.054,25.048 Q3.3 27.178,25.172 27.178,27.051 ; R3.1 27.305,27.178 27.178,27.051 ; R5.2 30.277,30.305 29.022,31.559 28.128,31.559 27.178,30.61 27.178,27.051
NetQ2_6: Q2.6 Q3.6 R2.1 R4.2 | length 15.5
  Top Layer w0.381: v1(22.606,24.384) 22.606,25.463 ; R2.1@22.863,27.305 22.606,27.048 22.606,25.463 ; Q2.6 23.624,25.266 23.25,25.266 23.053,25.463 22.606,25.463 ; Q3.6 29.21,23.357 ; v1(29.21,22.098) 29.21,23.357 ; R4.2@30.861,23.238 30.742,23.357 29.21,23.357
  Bottom Layer w0.381: v1(22.606,24.384) 26.924,24.384 v1(29.21,22.098)
NetQ3_1: Q3.1 Q3.4 R11.2 | length 11.3
  Top Layer w0.381: Q3.4 27.178,23.372 27.178,23.936 27.499,24.257 28.481,24.257 ; Q3.1 28.463,24.275 28.481,24.257 ; R11.2@30.991,20.32 31.193,20.522 31.193,21.287 32.258,22.352 32.258,24.003 31.623,24.638 29.845,24.638 29.464,24.257 28.481,24.257
NetQ4_1: Q4.1 R16.2 | length 4.4
  Top Layer w0.381: R16.2@14.478,20.831 14.576,20.831 14.986,20.421 14.986,19.939 16.495,18.43 Q4.1
NetQ4_2: Q4.2 R12.2 | length 4.4
  Top Layer w0.381: R12.2@14.478,15.37 14.703,15.37 15.112,15.78 15.112,16.122 15.24,16.249 15.24,16.256 16.764,17.78 Q4.2
NetQ4_3: Q4.3 R9.1 | length 4.7
  Top Layer w0.381: R9.1@17.142,20.701 17.142,20.476 18.415,19.203 18.415,17.496 18.084,17.165 17.677,17.165 Q4.3
NetQ4_4: Q4.4 R17.2 | length 3.7
  Top Layer w0.381: Q4.4 19.935,16.637 21.241,16.637 22.254,15.624 R17.2@22.479,15.624
NetQ4_5: Q4.5 R14.2 | length 3.1
  Top Layer w0.381: Q4.5 20.441,17.78 20.565,17.904 R14.2@22.479,17.904
NetQ4_6: Q4.6 R8.1 | length 6.5
  Top Layer w0.381: R8.1@17.174,23.746 17.399,23.746 17.624,23.746 18.542,22.828 18.542,20.066 19.442,19.166 Q4.6
NetQ5_1: Q5.1 R18.2 | length 4.6
  Top Layer w0.381: R18.2@25.654,20.704 25.879,20.704 26.288,20.294 26.288,19.69 Q5.1
NetQ5_2: Q5.2 R13.2 | length 3.4
  Top Layer w0.381: R13.2@25.654,15.624 26.802,15.624 27.942,16.764 Q5.2
NetQ5_3: Q5.3 R11.1 | length 5.5
  Top Layer w0.381: R11.1@28.191,20.32 28.601,19.91 28.601,19.532 29.464,18.669 29.464,16.383 29.195,16.114 Q5.3
NetQ5_4: Q5.4 R19.2 | length 3.6
  Top Layer w0.381: Q5.4 32.302,16.114 33.303,15.113 R19.2@33.528,15.113
NetQ5_5: Q5.5 R15.2 | length 3.5
  Top Layer w0.381: Q5.5 32.671,16.764 33.43,17.523 R15.2@33.528,17.523
NetQ5_6: Q5.6 R10.1 | length 8.7
  Top Layer w0.381: Q5.6 31.608,17.414 32.131,17.937 32.131,21.209 33.147,22.225 33.147,22.857 33.528,23.238 33.303,23.238 R10.1@32.894,22.828
NetQ6_1: Q6.1 R26.2
NetQ6_4: Q6.4 R24.1 R24.2 | length 6.6
  Top Layer w0.381: Q6.4 23.084,9.409 23.638,8.855 ; R24.1 23.638,8.855 ; R24.2 24.588,9.805 23.638,8.855
NetQ7_1: Q7.1 R28.2
NetQ7_4: Q7.4 R27.2 | length 3.8
  Top Layer w0.381: Q7.4 17.795,9.503 17.81,9.518 17.81,9.987 19.455,11.632 19.705,11.632 20.015,11.942 R27.2
NetQ8_1: Q8.1 R30.2
NetQ8_4: Q8.4 R29.2 | length 2.7
  Top Layer w0.381: R29.2@28.064,10.287 28.067,10.284 28.067,8.259 Q8.4
NetR4_1: R4.1 R7.1 U1.3 | length 26
  Top Layer w0.381: R4.1@30.861,26.038 31.271,25.628 31.649,25.628 32.639,24.638 34.417,24.638 35.052,24.003 35.052,16.84 36.016,15.876 36.016,15.626 36.326,15.316 R7.1 36.826,15.316 37.846,14.296 37.846,11.176 38.238,10.784 39.994,10.784 40.386,11.176 40.386,11.938 41.614,13.166 41.614,14.403 U1.3
NetR5_1: R5.1 R6.2 U1.2 | length 17.9
  Top Layer w0.381: R5.1@33.277,28.829 33.277,28.702 33.479,28.5 33.479,27.735 33.782,27.432 34.544,27.432 34.925,27.051 34.925,25.527 36.195,24.257 36.195,20.704 36.576,20.323 36.801,20.323 37.21,19.913 37.21,19.686 40.386,16.51 U1.2
NetR6_1: R6.1 U1.1 | length 4.7
  Top Layer w0.381: R6.1@36.576,17.523 36.651,17.448 37.543,17.448 39.096,15.895 39.096,14.465 U1.1
NetR12_1: R12.1 | length 12.2
  Top Layer w0.381: 2.289,12.57 R12.1@14.478,12.57
NetR13_1: R13.1 | length 16.2
  Top Layer w0.381: 20.828,2.921 23.876,2.921 v1(24.003,3.048) ; v1(24.003,13.843) 24.185,13.843 25.404,12.624 R13.1
  Bottom Layer w0.381: v1(24.003,3.048) v1(24.003,13.843)
NetR26_1: R26.1 R27.1 R31.2 | length 6.8
  Top Layer w0.381: R31.2@11.811,10.163 R26.1@14.478,10.163 ; R27.1@17.015,12.192 17.015,11.967 15.084,10.036 14.957,9.909 14.732,9.909 14.59,10.051 R26.1@14.478,10.163 ; R26.1@14.478,10.163 14.703,10.163 R26.1@14.478,10.163
NetR28_1: R28.1 R29.1 R32.2 | length 6.8
  Top Layer w0.381: R32.2@36.576,9.909 36.449,9.782 33.655,9.782 33.528,9.909 33.401,9.782 R29.1@31.274,9.782 ; R29.1@30.864,10.192 R29.1@31.274,9.782 ; R29.1@30.864,10.192 30.864,10.287 R29.1@30.864,10.192 ; R29.1@30.864,10.192 R29.1@31.274,9.782
Vbias_A: R14.1 R15.1 U1.6 U1.7 | length 23.6
  Top Layer w0.381: R14.1@22.479,20.704 22.704,20.704 24.003,19.405 v1(24.003,19.304) ; v1(41.148,17.78) 40.386,18.542 U1.7 U1.6
  Bottom Layer w0.381: v1(24.003,19.304) 25.527,17.78 v1(41.148,17.78)
VCC_LDO_OUT: C3.1 C4.1 Q6.3 R1.2 R2.2 R3.2 R20.2 U1.8 | length 4.6
  Top Layer w0.381: R20.2 18.796,4.826 20.97,7 Q6.3
VDD_LDO_OUT: C2.1 C5.1 C6.1 D1.1 R30.1 R31.1 R32.1 U1.4 | length 2.5
  Top Layer w0.381: R30.1 11.481,5.076 11.811,5.406 R31.1
Vref: R23.2 | length 2.7
  Top Layer w0.381: R23.2@35.43,28.829 35.43,28.604 35.84,28.195 35.93,28.195 36.068,28.057 v1(36.068,26.416)
copper on no net: | length 6.5
  Top Layer w0.381: 14.478,7.942 15.582,7.942 15.916,7.609 ; 15.46,4.826 15.46,5.042 16.641,6.223 19.05,6.223 19.338,6.511 ; 20.14,6.843 20.14,7.03

## Other copper
Multi-Layer:
  text "Pour signal planes with ground, attach to layer 2 and 3 with many, many vias. Route power. /  / Isolate ground routing for DC components. /  / Add input and output fuses, input inductors, pads, input diodes. /  / Stitching vias" at 61.214,17.653 h1.52

## Silkscreen, mask and mechanical layers (free items; w line width, h text height)
Top Overlay:
  lines w0.254: 7.493,31.369 7.493,43.942 22.352,43.942 22.352,40.64 23.495,40.64 23.495,29.972 19.685,29.972 19.685,31.369 7.493,31.369 ; 13.081,11.303 13.081,28.956 24.384,28.956 29.337,28.956 29.337,27.178 35.56,27.178 35.56,21.717 37.973,21.717 37.973,13.462 37.973,5.715 32.004,5.715 32.004,8.636 21.59,8.763 21.59,10.668 15.875,10.668 15.875,11.303 13.081,11.303